# EAGLE board combined (EAGLE 6.5.0)
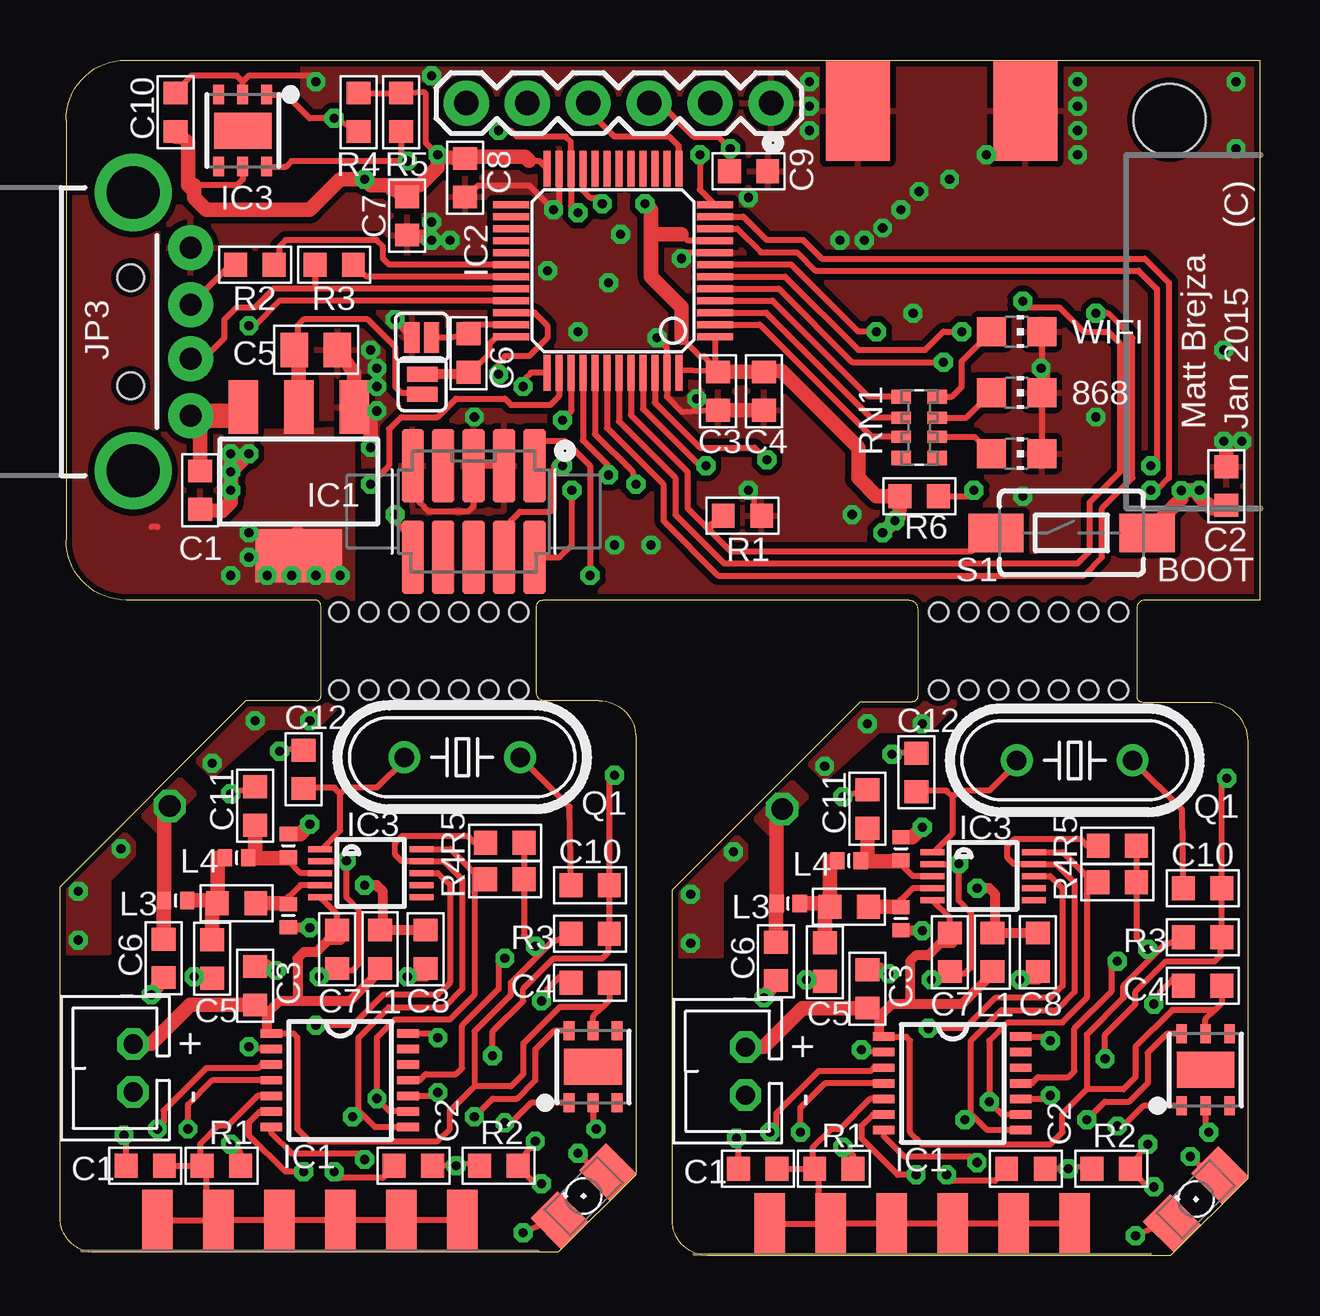
[diagram p0: board, top side]
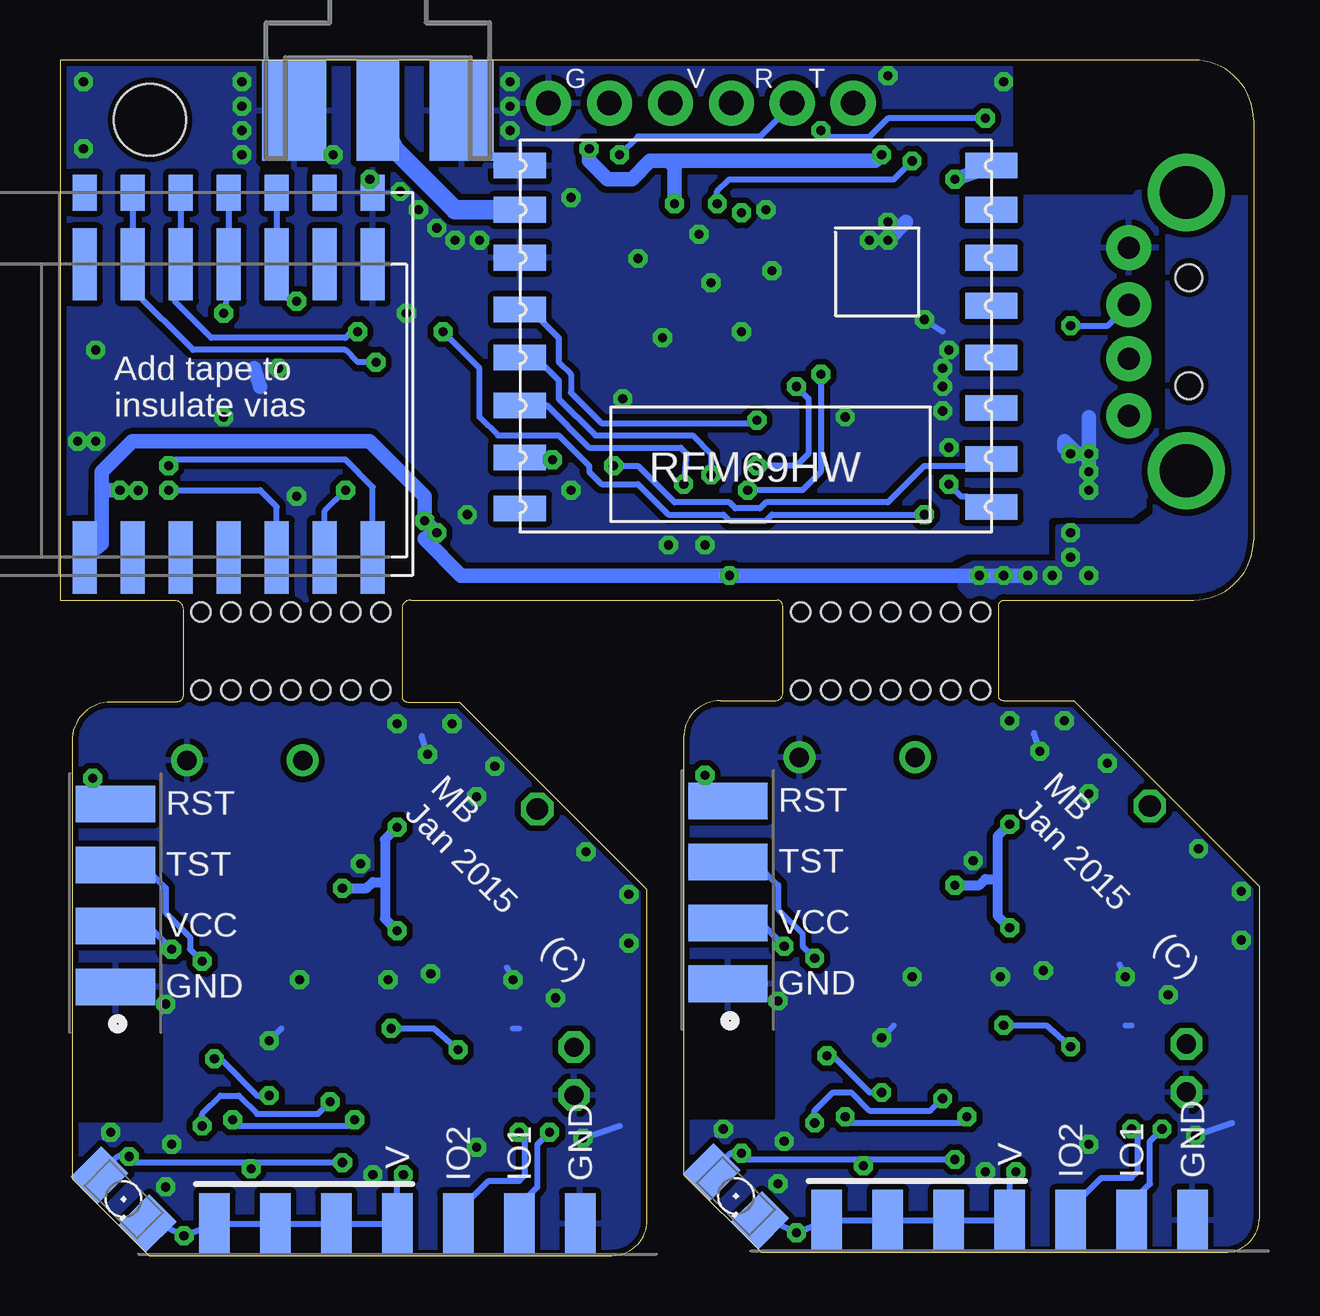
[diagram p1: board, bottom side, seen from below]

Size 50 x 49.81 mm. Coordinates in mm from the lower left corner, seen from the top.
Outline: 0.25,47.31 arc-90 2.75,49.81 50,49.81 50,27.31 45.25,27.31 arc90 44.88,26.94 44.88,23.31 arc90 45.12,23.06 47.88,23.06 arc-90 49.5,21.44 49.5,3.21 46.29,0 26.99,0 arc-90 25.53,1.46 25.53,15.24 33.35,23.06 35.5,23.06 arc90 35.75,23.31 35.75,26.94 arc90 35.38,27.31 20.12,27.31 arc90 19.87,27.06 19.87,23.43 arc90 20.19,23.11 22.48,23.11 arc-90 24,21.59 24,3.37 20.77,0.13 1.46,0.13 arc-90 0,1.59 0,15.37 7.75,23.11 10.68,23.11 arc90 10.88,23.31 10.88,27.06 arc90 10.62,27.31 2.75,27.31 arc-90 0.25,29.81 0.25,47.31
Copper layers (1*16): Top 0.035mm / dielectric 1.5mm / Bottom 0.035mm
Design rules "default *": minimum track width 8mil, minimum drill 13mil, track to track 8mil, track to pad 8mil, pad to pad 7mil, via to via 8mil, smd to smd 0mil, copper to edge 10mil, drill to drill 8mil, minimum pad ring 10mil, minimum via ring 8mil, stop-mask expansion 4mil, vias tented up to drill 16mil, thermal gap 10mil
Holes 3 mm at 46.24,47.33
Holes 0.8 mm at 16.62,26.81 17.88,26.81 19.12,26.81 16.62,23.56 17.88,23.56 19.12,23.56 40.38,26.81 41.62,26.81 42.88,26.81 44.12,26.81 40.38,23.56 41.62,23.56 42.88,23.56 44.12,23.56 15.38,26.81 14.12,26.81 12.88,26.81 11.62,26.81 15.38,23.56 14.12,23.56 12.88,23.56 11.62,23.56 39.12,23.56 37.88,23.56 36.62,23.56 39.12,26.81 37.88,26.81 36.62,26.81

## Footprints (pad centres in the part's own frame; a part is rotated, then mirrored left to right if it is on the bottom)
C0603-N = smd 0.95 x 1: 1 -0.8,0; 2 0.8,0
C0805-N = smd 1.15 x 1.45: 1 -0.9,0; 2 0.9,0
TSSOP14 = smd 0.9 x 0.35: 1 -2.875,1.95; 2 -2.875,1.3; 3 -2.875,0.65; 4 -2.875,0; 5 -2.875,-0.65; 6 -2.875,-1.3; 7 -2.875,-1.95; 8 2.825,-1.95; 9 2.825,-1.3; 10 2.825,-0.65; 11 2.825,0; 12 2.825,0.65; 13 2.825,1.3; 14 2.825,1.95
DFN6-L = smd 0.45 x 0.8: 1 -1,-1.5; 2 0,-1.5; 3 1,-1.5; 4 1,1.5; 5 0,1.5; 6 -1,1.5 | smd 2.4 x 1.5: EP 0,0
MSOP10 = smd 0.25 x 1: 1 -1,-2.113; 2 -0.5,-2.113; 3 0,-2.113; 4 0.5,-2.113; 5 1,-2.113; 6 1,2.113; 7 0.5,2.113; 8 0,2.113; 9 -0.5,2.113; 10 -1,2.113
TQFP48 = smd 0.3 x 1.5: 1 -2.75,-4.25; 2 -2.25,-4.25; 3 -1.75,-4.25; 4 -1.25,-4.25; 5 -0.75,-4.25; 6 -0.25,-4.25; 7 0.25,-4.25; 8 0.75,-4.25; 9 1.25,-4.25; 10 1.75,-4.25; 11 2.25,-4.25; 12 2.75,-4.25; 25 2.75,4.25; 26 2.25,4.25; 27 1.75,4.25; 28 1.25,4.25; 29 0.75,4.25; 30 0.25,4.25; 31 -0.25,4.25; 32 -0.75,4.25; 33 -1.25,4.25; 34 -1.75,4.25; 35 -2.25,4.25; 36 -2.75,4.25 | smd 1.5 x 0.3: 13 4.25,-2.75; 14 4.25,-2.25; 15 4.25,-1.75; 16 4.25,-1.25; 17 4.25,-0.75; 18 4.25,-0.25; 19 4.25,0.25; 20 4.25,0.75; 21 4.25,1.25; 22 4.25,1.75; 23 4.25,2.25; 24 4.25,2.75; 37 -4.25,2.75; 38 -4.25,2.25; 39 -4.25,1.75; 40 -4.25,1.25; 41 -4.25,0.75; 42 -4.25,0.25; 43 -4.25,-0.25; 44 -4.25,-0.75; 45 -4.25,-1.25; 46 -4.25,-1.75; 47 -4.25,-2.25; 48 -4.25,-2.75
SOT223 = smd 1.219 x 2.235: 1 -2.311,-3.099; 2 0,-3.099; 3 2.311,-3.099 | smd 3.6 x 2.2: 4 0,3.099
JST-2-TH = drill 0.8 octagon: 1 1,0; 2 -1,0
SWD_SMD_SHROUD = smd 0.914 x 3.048: 1 -2.54,-1.905; 2 -2.54,1.905; 3 -1.27,-1.905; 4 -1.27,1.905; 5 0,-1.905; 6 0,1.905; 7 1.27,-1.905; 8 1.27,1.905; 9 2.54,-1.905; 10 2.54,1.905
SJ_2S = smd 0.635 x 1.27: 1 -0.412,0; 2 0.412,0
USB-A-H = drill 0.914 pad 1.88: D+ 2.4,1.127; D- 2.4,-1.127; GND 2.4,3.5; VBUS 2.4,-3.5 | drill 2.2: GND2 0,-5.8; GND3 0,5.8 | hole 1.1: -0.1,2.25; -0.1,-2.25
FTDI_BASIC = drill 1.016 pad 1.88: CTS 10.16,0; DTR 0,0; GND 12.7,0; RXI 2.54,0; TXO 5.08,0; VCC 7.62,0
L0603-N = smd 0.95 x 1: 1 -0.8,0; 2 0.8,0
L0402-N = smd 0.59 x 0.72: 1 -0.48,0; 2 0.48,0
1206 = smd 1.6 x 1.803: A -1.422,0; C 1.422,0
CHIP-LED0805 = smd 1.2 x 1.2: A 0,-1.05; C 0,1.05
HC49/S = drill 0.813: 1 -2.413,0; 2 2.413,0
R0603-N = smd 0.95 x 1: 1 -0.8,0; 2 0.8,0
EXB38V = smd 0.6 x 0.8: 1 -1.275,-0.75; 4 1.275,-0.75; 5 1.275,0.75; 8 -1.275,0.75 | smd 0.5 x 0.8: 2 -0.4,-0.75; 3 0.4,-0.75; 6 0.4,0.75; 7 -0.4,0.75
TACTILE-SWITCH-1101NE = smd 2.3 x 1.6: 1 -3.15,0; 2 3.15,0
EDGE_4 = smd 1.524 x 3.302: 1 -3.81,0; 2 -1.27,0; 3 1.27,0; 4 3.81,0
MA07-1-SMD = smd 1.27 x 2.54: 1 -7.62,0; 2 -5.08,0; 3 -2.54,0; 4 0,0; 5 2.54,0; 6 5.08,0; 7 7.62,0
MA06-1-SMD = smd 1.27 x 2.54: 1 -7.62,0; 2 -5.08,0; 3 -2.54,0; 4 0,0; 5 2.54,0; 6 5.08,0
RFM = smd 2.184 x 1.067: ANT 19.651,2.889; DIO0 0,13.27; DIO1 0,11.143; DIO2 0,9.047; DIO3 0,6.889; DIO4 0,4.889; DIO5 0,2.889; GNDA 19.651,4.889; GNDB 19.651,1.048; MISO 19.651,9.047; MOSI 19.651,11.047; NC 19.651,15.334; NSS 19.651,13.206; RESET 0,15.27; SCK 19.651,7.048; VCC 0,1.048
ESP-07 = smd 1 x 1.5: 1 -13.4,0; 2 -11.4,0; 3 -9.4,0; 4 -7.4,0; 5 -5.4,0; 6 -3.4,0; 7 -1.4,0; 8 -1.4,15.95; 9 -3.4,15.95; 10 -5.4,15.95; 11 -7.4,15.95; 12 -9.4,15.95; 13 -11.4,15.95; 14 -13.4,15.95
ESP-03 = smd 1 x 3: 1 -13.4,0; 2 -11.4,0; 3 -9.4,0; 4 -7.4,0; 5 -5.4,0; 6 -3.4,0; 7 -1.4,0; 8 -1.4,12.2; 9 -3.4,12.2; 10 -5.4,12.2; 11 -7.4,12.2; 12 -9.4,12.2; 13 -11.4,12.2; 14 -13.4,12.2
J502-ND-142-0711-821/826 = smd 4.191 x 1.778: 1 2.115,0 | smd 4.191 x 2.667: G@1 2.115,3.495; G@2 2.115,-3.495 | smd 4.191 x 2.667 bottom: G@3 2.115,3.495; G@4 2.115,-3.495

## Placement (x,y rotation side)
C1  100n  [C0603-N]  3.56,3.75 0 top
C2  100n  [C0603-N]  14.73,3.75 0 top
C3  100n  [C0603-N]  8.13,11.24 90 top
C4  [C0603-N]  22.1,11.37 180 top
C5  5.1p  [C0603-N]  6.35,12.36 90 top
C6  5.1p  [C0603-N]  4.32,12.38 270 top
C7  1u  [C0603-N]  11.56,12.76 270 top
C8  2.4p  [C0603-N]  15.24,12.76 90 top
C9  1.2p  [C0603-N]  7.37,14.67 0 top
C10  47n  [C0603-N]  22.1,15.43 0 top
C11  2.4p  [C0603-N]  8.13,18.73 270 top
C12  14p  [C0603-N]  10.16,20.26 270 top
C13  100n  [C0603-N]  33.66,11.11 90 top
C14  1u  [C0603-N]  37.08,12.64 270 top
C15  14p  [C0603-N]  35.69,20.13 270 top
C16  2.4p  [C0603-N]  40.77,12.64 90 top
C17  2.4p  [C0603-N]  33.66,18.61 270 top
C18  1.2p  [C0603-N]  32.89,14.54 0 top
C19  5.1p  [C0603-N]  31.88,12.23 90 top
C20  5.1p  [C0603-N]  29.84,12.26 270 top
C21  47n  [C0603-N]  47.62,15.3 0 top
C22  100n  [C0603-N]  29.09,3.62 0 top
C23  100n  [C0603-N]  40.26,3.62 0 top
C24  [C0603-N]  47.62,11.24 180 top
C25  1u  [C0603-N]  27.43,36.02 270 top
C26  100n  [C0603-N]  17.03,37.6 90 top
C27  100n  [C0603-N]  16.89,44.91 270 top
C28  100n  [C0603-N]  28.7,45.18 0 top
C29  100n  [C0603-N]  29.34,36.02 270 top
C30  4u7  [C0603-N]  5.84,31.89 270 top
C31  4u7  [C0805-N]  10.67,37.73 0 top
C32  1u  [C0603-N]  48.62,32.06 90 top
C33  1u  [C0603-N]  14.48,43.32 270 top
C34  1u  [C0603-N]  4.83,47.64 90 top
IC1  MSP430G2X21  [TSSOP14]  11.68,7.3 0 top
IC2  HTU21D  [DFN6-L]  22.22,7.86 0 top
IC3  SI4012  [MSOP10]  12.95,15.94 270 top
IC4  MSP430G2X21  [TSSOP14]  37.21,7.18 0 top
IC5  SI4012  [MSOP10]  38.48,15.81 270 top
IC6  HTU21D  [DFN6-L]  47.75,7.74 0 top
IC7  STM32F072  [TQFP48]  23.05,41.03 90 top
IC8  1117EMP  [SOT223]  9.96,32.25 180 top
IC9  HTU21D  [DFN6-L]  7.62,46.88 180 top
J1  [JST-2-TH]  3.05,7.81 90 top
J2  [JST-2-TH]  28.57,7.68 90 top
J3  SWD_SHROUD_SMD  [SWD_SMD_SHROUD]  17.24,31 180 top
JP1  [SJ_2S]  15.1,36.3 270 top
JP2  [SJ_2S]  15.08,38.26 0 top
JP3  USB-A-H  [USB-A-H]  3.05,38.49 0 top
JP4  FTDI_BASICPTH  [FTDI_BASIC]  16.94,48.02 0 top
L1  120n  [L0603-N]  13.34,12.76 270 top
L2  3.6n  [L0402-N]  9.53,14.16 270 top
L3  6.8n  [L0402-N]  4.83,14.8 180 top
L4  30n  [L0402-N]  7.37,16.57 180 top
L5  3.6n  [L0402-N]  9.53,17.08 90 top
L6  30n  [L0402-N]  32.89,16.45 180 top
L7  6.8n  [L0402-N]  30.35,14.67 180 top
L8  3.6n  [L0402-N]  35.05,14.03 270 top
L9  3.6n  [L0402-N]  35.05,16.95 90 top
L10  120n  [L0603-N]  38.86,12.64 270 top
LED1  [1206]  21.82,2.48 225 top
LED2  [1206]  21.82,2.48 315 bottom
LED3  [1206]  47.35,2.35 225 top
LED4  [1206]  47.35,2.35 315 bottom
LED5  [CHIP-LED0805]  39.88,38.49 270 top
LED6  [CHIP-LED0805]  39.88,35.95 270 top
LED7  [CHIP-LED0805]  39.88,33.41 270 top
Q1  [HC49/S]  16.77,20.76 180 top
Q2  [HC49/S]  42.3,20.63 180 top
R1  47k  [R0603-N]  6.73,3.75 180 top
R2  1M  [R0603-N]  18.29,3.75 180 top
R3  22k  [R0603-N]  22.1,13.4 180 top
R4  4k7  [R0603-N]  18.54,15.68 0 top
R5  4k7  [R0603-N]  18.54,17.21 0 top
R6  1M  [R0603-N]  43.81,3.62 180 top
R7  47k  [R0603-N]  32.26,3.62 180 top
R8  22k  [R0603-N]  47.62,13.27 180 top
R9  4k7  [R0603-N]  44.07,15.55 0 top
R10  4k7  [R0603-N]  44.07,17.08 0 top
R11  10k  [R0603-N]  28.45,30.83 180 top
R12  100k  [R0603-N]  11.43,41.29 180 top
R13  10k  [R0603-N]  8.13,41.29 180 top
R14  4k7  [R0603-N]  14.22,47.64 90 top
R15  4k7  [R0603-N]  12.45,47.64 90 top
R16  1k  [R0603-N]  35.81,31.64 0 top
RN1  330  [EXB38V]  35.81,34.51 270 top
S1  SWITCH-MOMENTARY-2SMD-1101NE  [TACTILE-SWITCH-1101NE]  42.16,30.11 0 top
SV1  [EDGE_4]  47.69,15.01 90 bottom
SV2  [MA07-1-SMD]  10.41,1.46 0 bottom
SV3  [EDGE_4]  22.16,15.13 90 bottom
SV4  [MA07-1-SMD]  35.94,1.33 0 bottom
U$1  MA06-1  [MA06-1-SMD]  11.68,1.46 0 top
U$2  MA06-1  [MA06-1-SMD]  37.21,1.33 0 top
U$3  RFM69HW  [RFM]  11.18,46.46 180 bottom
U$4  ESP-07  [ESP-07]  35.56,28.33 0 bottom
X1  ESP-03  [ESP-03]  35.56,29.1 0 bottom
X2  SMA-142-0711-821/826  [J502-ND-142-0711-821/826]  36.75,49.82 270 bottom

## Library data of the parts
C1-C34 L1-L10 R1-R16 = passives-7351
IC1-IC6 IC9 SV1-SV4 U$1 U$2 U$4 X1 = Mine
IC7 IC8 J1-J3 = dtb
JP1 JP2 = SparkFun-Passives
JP3 JP4 = SparkFun-Connectors
LED1-LED7 = led
Q1 Q2 = crystal; OC_FARNELL: 1667008; OC_NEWARK: unknown
RN1 = resistor-dil; OC_FARNELL: unknown; OC_NEWARK: unknown
S1 = SparkFun-Electromechanical; PROD_ID: SWCH-00815
U$3 = hoperf
X2 = con-coax; MF: JOHNSON COMPONENTS; MPN: 142-0711-821; OC_FARNELL: 1019328; OC_NEWARK: 16F3627

## Nets
+3V1: C13.1 C14.1 C24.1 IC4.1 IC5.5 IC6.5 J2.1 L10.2 R8.2 R9.2 R10.2 SV1.2
+3V2: C25.1 C27.1 C28.1 C29.1 C31.1 C32.1 C33.1 C34.1 IC7.1 IC7.9 IC7.24 IC7.48 IC8.2 IC8.4 IC9.5 J3.1 JP1.2 JP4.VCC R14.2 R15.2 R16.1 S1.2 U$3.VCC U$4.1 X1.1
+3V3: C3.1 C4.1 C7.1 IC1.1 IC2.5 IC3.5 J1.1 L1.2 R3.2 R4.2 R5.2 SV3.2
CH_PD: IC7.5 U$4.13 X1.13
DIO0: IC7.45 U$3.DIO0
DM: IC7.32 JP3.D- R12.2
DP: IC7.33 JP3.D+ R13.2
GND: C1.1 C2.1 C3.2 C4.2 C5.1 C6.2 C7.2 C8.1 C10.1 C11.1 C12.1 IC1.14 IC2.2 IC3.2 J1.2 Q1.1 R1.1 R2.1 SV2.7 SV3.1
GND1: C13.2 C14.2 C15.1 C16.1 C17.1 C19.1 C20.2 C21.1 C22.1 C23.1 C24.2 IC4.14 IC5.2 IC6.2 J2.2 Q2.1 R6.1 R7.1 SV1.1 SV4.7
GND2: C25.2 C27.2 C28.2 C29.2 C30.2 C31.2 C32.2 C33.2 C34.2 IC7.8 IC7.23 IC7.47 IC8.1 IC9.2 J3.3 J3.5 J3.9 JP2.1 JP3.GND JP4.GND LED5.C LED6.C LED7.C R11.1 U$3.GNDA U$3.GNDB U$4.8 X1.8 X2.G@1 X2.G@2 X2.G@3 X2.G@4
GPIO0: IC7.10 U$4.7 X1.7
GPIO15: IC7.11 U$4.5 X1.5
I2C2_SCL: IC7.21 IC9.6 R14.1
I2C2_SDA: IC7.22 IC9.1 R15.1
IO1: IC1.3 SV2.6
IO2: IC1.4 SV2.5
IO3: IC4.3 SV4.6
IO4: IC4.4 SV4.5
MISO: IC7.40 U$3.MISO
MOSI: IC7.41 U$3.MOSI
N$1: IC1.2 IC3.8
N$2: IC1.11 SV3.3
N$4: C8.2 L1.1 L2.2 L5.2
N$5: C12.2 IC3.1 Q1.2
N$6: IC4.11 SV1.3
N$7: C5.2 C9.1 L3.1 L4.2
N$8: C11.2 IC3.3 L4.1 L5.1
N$9: C9.2 IC3.4 L2.1
N$10: C6.1 L3.2
N$11: C15.2 IC5.1 Q2.2
N$12: C1.2 IC1.5 R1.2 U$1.1 U$1.2 U$1.3 U$1.4 U$1.5 U$1.6
N$13: C2.2 IC1.7 LED1.A LED2.A R2.2
N$14: C16.2 L8.2 L9.2 L10.1
N$15: C10.2 IC1.10 R3.1 SV3.4
N$16: C18.1 C19.2 L6.2 L7.1
N$17: C17.2 IC5.3 L6.1 L9.1
N$18: C18.2 IC5.4 L8.1
N$19: C20.1 L7.2
N$20: C22.2 IC4.5 R7.2 U$2.1 U$2.2 U$2.3 U$2.4 U$2.5 U$2.6
N$21: C23.2 IC4.7 LED3.A LED4.A R6.2
N$22: C21.2 IC4.10 R8.1 SV1.4
N$23: IC4.2 IC5.8
N$25: C26.1 IC7.36 JP1.1
N$26: C26.2 IC7.35 JP2.2
N$27: IC7.44 R11.2 S1.1
N$28: IC7.31 R12.1
N$29: IC7.30 R13.1
N$30: LED5.A RN1.8
N$31: LED6.A RN1.7
N$32: LED7.A RN1.6
N$33: IC7.2 RN1.3
N$34: IC7.3 RN1.2
N$35: IC7.4 RN1.1
N$36: IC7.14
N$37: IC7.15
N$38: IC7.16
N$39: IC7.17
N$40: IC7.26
N$41: IC7.27
N$42: U$3.ANT X2.1
N$44: R16.2 U$4.6 X1.6
N$45: U$4.2 X1.2
N$46: U$4.4 X1.4
N$47: U$4.3 X1.3
NRST: IC7.7 J3.10
NSS: IC7.46 U$3.NSS
RST: IC7.38 U$3.RESET
SCK: IC7.39 U$3.SCK
SCL: IC1.8 IC2.6 IC3.9 R5.1
SCL1: IC4.8 IC5.9 IC6.6 R10.1
SDA: IC1.9 IC2.1 IC3.10 R4.1
SDA1: IC4.9 IC5.10 IC6.1 R9.1
SWCLK: IC7.37 J3.4
SWDAT: IC7.34 J3.2
USART1_RX: IC7.43 U$4.10 X1.10
USART1_TX: IC7.42 U$4.11 X1.11
USART2_RX: IC7.13 JP4.TXO
USART2_TX: IC7.12 JP4.RXI
VBUS: C30.1 IC8.3 JP3.VBUS
VCCS: IC1.6 LED1.C LED2.C SV2.1 SV2.2 SV2.3 SV2.4
VCCS1: IC4.6 LED3.C LED4.C SV4.1 SV4.2 SV4.3 SV4.4
VCCS2: IC1.13
VCCS3: IC4.13
W_RST: IC7.6 U$4.12 X1.12

## Tracks (layer width: path | path; a pad name or v marks a point on that pad's centre or on a via)
+3V1  (via drill 0.38)
  Top 0.229: 46.35,10.22 44.83,8.7
  Top 0.254: C13.1 33.91,10.22 34.16,9.97 | 34.16,9.21 IC4.1 35.26,9.13 35.43,8.95 35.43,5.14 35.94,4.64 41.27,4.64 41.78,5.14 41.78,5.91 42.8,6.92 | 37.21,13.02 C14.1 37.08,14.1 IC5.5 | 45.59,12.51 44.32,11.24 44.32,10.73 42.8,9.21 42.8,6.92 | 45.59,12.51 46.1,13.02 46.27,13.02 R8.2 | 45.59,12.51 v45.34,12.76 44.87,13.23 R9.2 R10.2 | IC6.5 47.75,9.84 48.13,10.22 | C24.1 48.42,10.52 48.13,10.22 | 48.13,10.22 46.35,10.22 | 44.83,8.7 44.83,7.43 44.32,6.92 42.8,6.92
  Top 0.406: 35.43,10.48 37.59,10.48 39.15,12.04 L10.2 | 35.43,10.48 34.67,10.48 34.16,9.97 34.16,9.21 | 37.21,13.02 36.7,13.02 36.2,12.51 35.69,12.51 35.43,12.26 35.43,10.48
  Top 0.61: C13.1 30.95,10.31 29.34,8.7 28.59,8.7 J2.1
  Bottom 0.254: SV1.2 47.39,14.03 46.61,14.03 v45.34,12.76
+3V2  (via drill 0.38)
  Top 0.254: C25.1 25.91,36.89 IC7.48 | C25.1 26.85,37.48 26.67,37.48 25.91,38.24 | IC7.1 27.3,37.02 C25.1 | 4.06,30.37 3.81,30.37 | IC9.5 7.62,44.84 7.37,44.59 5.59,44.59 | C34.1 4.83,46.62 | R15.2 R14.2 15.15,48.49 15.24,48.4 15.24,46.37 v15.75,45.86 | C31.1 9.91,37.59 9.91,38.75 10.16,39 12.83,39 13.97,37.86 13.97,36.21 14.22,35.95 14.53,35.95 JP1.2 | JP4.VCC 25.02,48.02 26.42,46.62 27.43,46.62 v27.94,46.11 27.94,45.61 27.83,45.49 C28.1 | 19.56,45.61 19.98,45.61 IC7.24 | S1.2 45.31,30.47 | IC7.9 26.18,42.28 25.91,42.56 | 19.78,33.13 J3.1 19.81,32.94 19.81,33.67 20.07,33.92 21.08,33.92 22.1,32.91 v22.1,28.33
  Top 0.61: 9.91,30.11 10.16,29.86 | 13.97,44.59 14.99,44.59 15.75,45.35 v15.75,45.86 15.82,45.78 C27.1 16.92,45.78 19.38,45.78 19.56,45.61 | 13.97,44.59 12.95,44.59 v12.7,44.84 11.68,44.84 10.41,43.57 6.1,43.57 5.59,44.08 5.59,44.34 | C33.1 13.83,44.45 13.97,44.59 | IC8.2 9.96,37.31 C31.1 | 4.83,46.62 5.08,46.62 5.33,46.37 5.33,44.59 5.59,44.34 | 5.59,44.59 5.59,44.34 | 24.64,42.56 24.64,40.78 25.91,39.51 25.91,38.24 | 24.64,42.56 24.64,43.57 v24.38,43.83 | 25.91,42.56 24.64,42.56 | C25.1 C29.1 30.07,36.87 33.27,33.67 33.27,32.4 34.04,31.64 R16.1 34.96,30.79 v34.8,30.62 v34.29,30.11 | C32.1 48.54,31.13 48.01,31.13 47.5,31.64 v47.5,31.89 46.75,31.89 v46.74,31.88 46.74,31.54 S1.2
  Bottom 0.254: 27.43,45.35 27.18,44.84 | U$4.1 X1.1
  Bottom 0.61: v9.65,28.33 v22.1,28.33 33.27,28.33 34.8,29.86 v34.29,30.11 v34.8,30.62 34.8,31.64 37.08,33.92 46.99,33.92 48.26,32.65 48.26,31.89 | v27.94,46.11 27.94,45.61 27.18,44.84 26.16,44.84 25.4,45.61 24.64,45.61 | 24.64,45.61 16,45.61 v15.75,45.86 | U$3.VCC 11.11,45.42 v12.7,44.84 | X1.1 48.26,29.67 48.26,31.89 | 48.26,31.89 v47.5,31.89 | v24.38,43.83 24.38,45.35 24.64,45.61
  other vias: 7.87,30.11 7.87,29.1 8.64,28.33 10.67,28.33 11.68,28.33 7.11,28.33
  pour Top (isolate 0.254): -0.51,44.08 4.06,44.08 3.81,27.57 -0.25,28.08 -0.25,35.7 -0.51,35.7
  pour Bottom (isolate 0.254): 12.45,24.78 4.32,30.87 4.32,33.41 3.81,34.43 3.81,43.07 4.57,43.83 4.06,44.34 2.54,44.59 2.54,44.84 2.03,44.08 -0.25,44.08 -0.25,26.56 0,26.3
  pour Top (isolate 0.254, no thermals): 3.3,27.32 12.19,27.32 12.19,33.67 12.7,34.43 2.79,34.18 2.03,33.16 2.03,27.83 2.29,27.57
  pour Bottom (isolate 0.254): 3.81,27.32 11.94,27.32 12.45,27.83 12.45,28.59 11.94,28.84 8.38,28.84 8.38,30.37 4.32,30.37 4.06,30.62 4.06,28.84 3.81,28.59
+3V3  (via drill 0.38)
  Top 0.229: 20.83,10.35 19.3,8.83
  Top 0.254: C3.1 8.38,10.35 8.64,10.1 | 8.64,9.33 IC1.1 9.73,9.25 9.91,9.08 9.91,5.27 10.41,4.76 15.75,4.76 16.26,5.27 16.26,6.03 17.27,7.05 | 11.68,13.14 C7.1 11.56,14.22 IC3.5 | 20.07,12.64 18.8,11.37 18.8,10.86 17.27,9.33 17.27,7.05 | 20.07,12.64 20.57,13.14 20.74,13.14 R3.2 | 20.07,12.64 v19.81,12.89 19.34,13.36 R4.2 R5.2 | IC2.5 22.22,9.96 22.61,10.35 | C4.1 22.9,10.64 22.61,10.35 | 22.61,10.35 20.83,10.35 | 19.3,8.83 19.3,7.56 18.8,7.05 17.27,7.05
  Top 0.406: 9.91,10.6 12.06,10.6 13.62,12.16 L1.2 | 9.91,10.6 9.14,10.6 8.64,10.1 8.64,9.33 | 11.68,13.14 11.18,13.14 10.67,12.64 10.16,12.64 9.91,12.38 9.91,10.6
  Top 0.61: C3.1 5.42,10.44 3.81,8.83 3.06,8.83 J1.1
  Bottom 0.254: SV3.2 21.86,14.16 21.08,14.16 v19.81,12.89
CH_PD  (via drill 0.38)
  Top 0.254: v36.83,37.22 33.02,37.22 29.96,40.28 IC7.5
  Bottom 0.254: v36.83,37.22 37.59,37.22 38.1,37.73 44.45,37.73 46.99,40.27 46.99,41.27 X1.13 U$4.13
DIO0  (via drill 0.38)
  Top 0.254: IC7.45 24.3,35.28 26.67,32.91 v26.92,32.91
  Bottom 0.254: v26.92,32.91 25.91,32.91 24.38,31.38 22.1,31.38 21.84,31.13 20.83,31.13 20.57,31.38 15.49,31.38 13.97,32.91 11.46,32.91 U$3.DIO0
DM
  Top 0.254: IC7.32 10.67,40.28 | 10.67,40.28 8.9,40.28 8.13,39.51 7.37,39.51 6.86,39 6.86,38.24 5.99,37.37 JP3.D- | R12.2 10.63,40.32 10.67,40.28
DP  (via drill 0.38)
  Top 0.254: IC7.33 9.16,39.78 8.13,38.75 v7.87,38.75 | R13.2 7.13,41.3 JP3.D+
  Bottom 0.254: v7.87,38.75 6.32,38.75 JP3.D+
GND  (via drill 0.38)
  Top 0.254: IC3.2 v11.93,16.44 v11.94,16.45 11.94,14.92 12.45,14.41 12.45,12.13 12.19,11.87 11.68,11.87 | IC1.14 15.41,9.25 v15.75,9.08 | C11.1 v7.11,19.24 | C5.1 v5.59,11.62 | C3.2 8.68,12.22 v9.02,11.87 | C7.2 11.09,11.79 v10.79,11.62 | C12.1 9.75,21.11 v9.15,21.02 | IC2.2 22.22,5.4 v22.35,5.27 | C2.1 13.86,3.64 13.46,3.24 11.68,3.24 v11.43,3.49 | C4.2 20.83,11.62 20.32,11.11 20.32,10.86 v20.07,10.6 | C10.1 21.25,18.69 Q1.1 | v19.81,4.76 19.65,4.6 R2.1 19.09,3.71 19.81,2.98 v20.07,2.98 | C1.1 2.76,4.93 v2.67,5.02 | R1.1 7.53,4.29 v7.11,4.64
  Top 0.406: C8.1 15.24,11.62 v14.48,11.62
  Top 0.61: v3.81,10.86 C6.2
  Bottom 0.254: v11.94,16.45 12.19,16.45 | 5.59,9.59 5.33,9.59 | v15.75,9.08 15.24,9.59 | v5.59,11.62 5.84,12.13 | v10.79,11.62 10.67,11.62 | v9.15,21.02 9.4,21.78 | v22.35,5.27 22.61,5.02 | v11.43,3.49 11.18,3.49 | v19.81,4.76 19.81,5.02 | v2.67,5.02 1.14,5.52
  other vias: 0.76,13.14 2.54,16.95 0.76,15.18 8.13,22.29 6.35,20.51 10.41,22.29
  pour Bottom (isolate 0.254): 0,23.05 24.13,23.05 24.13,-0.06 0,-0.06
  pour Top: 0,12.64 2.03,12.64 2.03,15.68 3.05,16.7 3.05,17.21 2.29,17.97 2.03,17.97 -0.25,15.68 -0.25,12.89
  pour Top: 6.35,20 8.64,22.03 10.67,22.03 11.94,23.3 7.37,23.3 5.33,21.27 5.33,21.02
GND1  (via drill 0.38)
  Top 0.254: IC5.2 37.46,16.31 v37.47,16.32 37.47,14.8 37.97,14.29 37.97,12 37.72,11.75 37.21,11.75 | IC4.14 40.94,9.13 v41.27,8.95 | C17.1 v32.64,19.11 | C19.1 v31.11,11.49 | C13.2 34.2,12.09 v34.54,11.75 | C14.2 36.62,11.66 v36.32,11.49 | C15.1 35.27,20.98 v34.68,20.89 | IC6.2 47.75,5.28 v47.88,5.14 | C23.1 39.39,3.51 38.99,3.11 37.21,3.11 v36.96,3.37 | C24.2 46.35,11.49 45.85,10.99 45.85,10.73 v45.59,10.48 | C21.1 46.77,18.57 Q2.1 | v45.34,4.64 45.17,4.47 R6.1 44.62,3.58 45.34,2.86 v45.59,2.86 | C22.1 28.29,4.8 v28.19,4.89 | R7.1 33.06,4.17 v32.64,4.51
  Top 0.406: C16.1 40.77,11.49 v40.01,11.49
  Top 0.61: v29.34,10.73 C20.2
  Bottom 0.254: v37.47,16.32 37.72,16.32 | 31.11,9.46 30.86,9.46 | v41.27,8.95 40.77,9.46 | v31.11,11.49 31.37,12 | v36.32,11.49 36.2,11.49 | v34.68,20.89 34.92,21.65 | v47.88,5.14 48.13,4.89 | v36.96,3.37 36.7,3.37 | v45.34,4.64 45.34,4.89 | v28.19,4.89 26.67,5.4
  other vias: 26.29,13.02 28.07,16.83 26.29,15.05 33.66,22.16 31.88,20.38 35.94,22.16
  pour Bottom (isolate 0.254): 25.53,22.92 49.66,22.92 49.66,-0.19 25.53,-0.19
  pour Top: 25.53,12.51 27.56,12.51 27.56,15.56 28.57,16.57 28.57,17.08 27.81,17.84 27.56,17.84 25.27,15.56 25.27,12.76
  pour Top: 31.88,19.88 34.16,21.91 36.2,21.91 37.47,23.18 32.89,23.18 30.86,21.15 30.86,20.89
GND2  (via drill 0.38)
  Top 0.254: C25.2 25.96,35.14 25.3,35.8 IC7.47 25.3,37.83 v24.89,38.24 | J3.3 J3.5 17.24,31.22 17.02,31 15.37,31 14.99,31.38 14.99,33.38 J3.9 14.48,33.64 14.48,34.18 | JP2.1 14.46,38.38 v13.97,39 | IC7.23 20.8,43.8 v20.57,43.57 19.56,44.59 17.45,44.59 C27.2 | IC9.2 7.62,48.91 | 7.62,48.91 7.37,49.16 5.47,49.16 C34.2 | v10.67,48.91 10.41,49.16 7.87,49.16 7.62,48.91 | R11.1 28.96,31.17 28.96,31.64 v28.7,31.89 | C28.2 29.58,44.96 | IC7.8 26.15,41.78 v25.91,41.54 | v13.21,35.19 12.43,35.19 IC8.1 | LED5.C LED6.C | LED6.C LED7.C | LED6.C 41.15,35.95 41.15,36.72 v40.89,36.97
  Top 0.305: J3.9 14.7,33.13
  Top 0.61: C33.2 15.13,42.44 v15.49,42.3 | IC8.1 12.27,36.75 C31.2 | C30.2 6.75,31.01 7.11,31.38 v7.11,32.65 | v7.11,32.65 v7.11,33.41 | v7.11,32.65 v7.87,33.41 | C32.2 48.62,33.56 v48.51,33.92 | C29.2 C25.2 | v12.95,33.67 12.95,34.94 v13.21,35.19
  Bottom 0.254: v13.97,39 13.21,38.49 | v28.7,44.08 28.45,44.08 | v24.89,38.24 24.64,38.24
  Bottom 0.61: 41.91,36.97 41.66,36.21 | v15.49,42.3 14.73,43.07 | v7.11,33.41 7.11,34.94 | v7.11,33.41 v7.11,32.65 | v7.11,33.41 7.62,33.41 8.13,33.92 8.13,33.67 v7.87,33.41
  other vias: 32.51,42.3 35.05,43.57 33.53,42.3 35.81,44.34 37.08,44.84 38.61,45.86 42.42,45.86 42.42,46.88 42.42,47.89 42.42,48.91 31.24,46.88 34.29,42.81 49.26,33.92 15.49,43.07 31.24,47.89 31.24,48.91 26.54,35.7 35.56,39.26 43.18,34.94 40.13,31.64 33.02,30.87 24.64,29.6 23.11,29.6 49.02,48.91 49.02,46.11 48.51,37.73 21.59,38.49 20.32,41.03 23.37,42.56 16.26,42.3 15.49,49.16 22.86,40.53 17.27,34.94 12.95,37.73 13.21,36.97 13.21,36.21 7.11,31.89
  pour Bottom (isolate 0.254, rank 2): -0.51,50.18 52.07,50.18 52.07,27.32 -1.52,27.32 -1.52,29.1
  pour Top (isolate 0.254, rank 2): 50.29,49.92 50.29,44.08 50.55,26.05 13.72,27.06 -1.52,26.56 -1.78,43.83 10.16,43.57 10.16,50.69 11.94,50.94
GPIO0  (via drill 0.38)
  Top 0.254: IC7.10 28.22,42.78 29.21,41.8 30.73,41.8 31.5,41.03 44.96,41.03 45.72,40.27 45.72,33.16 v45.47,32.91
  Bottom 0.254: 45.21,32.91 v45.47,32.91 45.21,33.16 38.1,33.16 36.96,32.02 X1.7 U$4.7
GPIO15  (via drill 0.38)
  Top 0.254: IC7.11 28.48,43.28 29.46,42.3 30.99,42.3 31.75,41.54 45.21,41.54 46.23,40.53 46.23,32.4 45.72,31.89 v45.47,31.89
  Bottom 0.254: v45.47,31.89 41.66,31.89 40.96,31.19 X1.5 U$4.5
I2C2_SCL  (via drill 0.38)
  Top 0.254: IC7.21 21.8,44.38 22.1,44.08 22.35,44.08 v22.61,43.83 | IC9.6 9.42,45.38 9.65,45.61 v14.48,45.61 14.22,45.86 R14.1
  Bottom 0.254: v22.61,43.83 22.61,44.34 22.1,44.84 15.24,44.84 v14.48,45.61
I2C2_SDA  (via drill 0.38)
  Top 0.254: v21.59,43.45 21.3,43.74 IC7.22 21.3,46.4 21.08,46.62 19.05,46.62 18.8,46.88 v18.29,46.88 | R15.1 v11.43,47.38 10.41,47.38 9.42,48.38 IC9.1
  Bottom 0.254: v21.59,43.45 21.59,43.32 | v18.29,46.88 18.03,46.62 16.26,46.62 15.49,47.38 v11.43,47.38
IO1  (via drill 0.38)
  Top 0.254: IC1.3 8.4,7.95 8.26,7.81 6.1,7.81 4.32,6.03 4.32,5.52 v4.06,5.27
  Bottom 0.254: SV2.6 5.33,2.22 4.57,2.98 4.57,4.76 v4.06,5.27
IO2  (via drill 0.38)
  Top 0.254: IC1.4 6.35,7.3 5.33,6.29 v5.33,5.27
  Bottom 0.254: SV2.5 7.87,1.97 6.6,3.24 5.33,3.24 5.08,3.49 5.08,5.02 v5.33,5.27
IO3  (via drill 0.38)
  Top 0.254: IC4.3 33.92,7.83 33.78,7.68 31.62,7.68 29.84,5.91 29.84,5.4 v29.59,5.14
  Bottom 0.254: SV4.6 30.86,2.1 30.1,2.86 30.1,4.64 v29.59,5.14
IO4  (via drill 0.38)
  Top 0.254: IC4.4 31.88,7.18 30.86,6.16 v30.86,5.14
  Bottom 0.254: SV4.5 33.4,1.84 32.13,3.11 30.86,3.11 30.61,3.37 30.61,4.89 v30.86,5.14
MISO  (via drill 0.38)
  Top 0.254: IC7.40 21.8,33.97 22.86,32.91 v22.86,32.52
  Bottom 0.254: U$3.MISO 30.16,37.42 29.21,36.46 29.21,35.7 27.69,34.18 23.62,34.18 22.86,33.41 v22.86,32.52
MOSI  (via drill 0.38)
  Top 0.254: v24,32.14 23.88,32.65 22.3,34.23 IC7.41
  Bottom 0.254: U$3.MOSI 29.69,35.42 27.94,33.67 24.13,33.67 23.88,33.41 v24,32.14
N$1  (via drill 0.38)
  Top 0.254: IC3.8 15.75,15.94 16.26,15.43 16.26,11.37 15.75,10.86 13.46,10.86 12.19,9.59 v10.67,9.59 | v7.87,8.7 8.78,8.57 IC1.2
  Bottom 0.254: v10.67,9.59 8.89,9.59 v7.87,8.7
N$2  (via drill 0.38)
  Top 0.254: v18.54,12.38 18.29,12.13 18.29,11.11 16.76,9.59 16.76,7.81 16.51,7.56 15.24,7.56 14.99,7.3 IC1.11
  Bottom 0.254: v18.54,12.38 19.05,12.89 19.05,13.4 20.07,14.41 20.07,15.43 21.04,16.4 SV3.3
N$3
  cutout Bottom: 23.88,10.1 20.32,10.1 20.32,5.78 24.13,5.78 24.13,6.29
N$4  (via drill 0.38)
  Top 0.254: L2.2 9.77,13.68 9.79,13.65
  Top 0.406: 10.3,17.86 v10.41,17.97 | v10.41,13.65 9.79,13.65 | 13.46,13.69 13.46,13.56 C8.2 | 13.46,13.69 13.46,15.18 13.21,15.43 v12.7,15.43 | 13.46,13.69 L1.1
  Top 0.61: L5.2 10.01,17.56 v10.41,17.97
  Bottom 0.406: v10.41,17.97 10.92,17.46 10.92,15.68 | 10.92,15.68 10.92,14.16 v10.41,13.65 | v12.7,15.43 11.68,15.43 11.43,15.68 10.92,15.68
N$5
  Top 0.254: IC3.1 10.91,16.94 11.68,17.72 11.68,19.24 | 11.68,19.24 11.43,19.49 10.25,19.49 C12.2 | Q1.2 14.36,20.64 13.21,19.49 11.94,19.49 11.68,19.24
N$6  (via drill 0.38)
  Top 0.254: v44.07,12.26 43.81,12 43.81,10.99 42.29,9.46 42.29,7.68 42.04,7.43 40.77,7.43 40.51,7.18 IC4.11
  Bottom 0.254: v44.07,12.26 44.58,12.76 44.58,13.27 45.59,14.29 45.59,15.3 46.56,16.28 SV1.3
N$7
  Top 0.61: 6.6,14.58 C9.1 | C5.2 6.35,14.5 C9.1 | L3.1 6.57,14.8 C9.1 | C9.1 6.57,16.57 L4.2
N$8
  Top 0.254: IC3.3 10.02,15.94 9.53,16.43
  Top 0.305: 9.53,16.43 L5.1
  Top 0.61: C11.2 8.13,16.56 | 8.13,16.56 9.48,16.56 L5.1 | 8.13,16.56 7.86,16.56 L4.1
N$9
  Top 0.254: IC3.4 10.03,15.44 9.53,14.94 | L2.1 9.54,14.67
  Top 0.305: 9.53,14.94 L2.1
  Top 0.61: C9.2 9.54,14.67
N$10  (via drill 0.9)
  Top 0.61: C6.1 4.32,14.77 L3.2 4.35,18.51 v4.57,18.73
  pour Top: 3.05,18.99 3.05,18.73 4.06,17.72 5.59,19.24 4.57,20.26
N$11
  Top 0.254: IC5.1 36.43,16.81 37.21,17.59 37.21,19.11 | 37.21,19.11 36.96,19.37 35.78,19.37 C15.2 | Q2.2 39.88,20.51 38.73,19.37 37.47,19.37 37.21,19.11
N$12
  Top 0.254: 6.1,1.59 6.1,3.75 R1.2 | 6.1,1.59 6.1,1.46 U$1.1 | C1.2 R1.2 | IC1.5 8.24,6.65 6.99,5.4 6.6,5.4 5.84,4.64 5.84,3.66 R1.2 | U$1.6 U$1.5 U$1.4 U$1.3 U$1.2 6.22,1.46 6.1,1.59
N$13  (via drill 0.38)
  Top 0.254: IC1.7 8.81,5.1 9.65,4.25 12.45,4.25 v12.7,4 | LED2.A 22.36,3.48 v21.59,4.25 | C2.2 v16.51,3.75 16.84,3.82 R2.2
  Bottom 0.254: LED2.A 22.06,4.25 v21.59,4.25 21.34,4 16.51,4 | v12.7,4 16.51,4 | 16.51,4 v16.51,3.75
N$14  (via drill 0.38)
  Top 0.254: L8.2 35.29,13.55 35.32,13.53
  Top 0.406: 35.83,17.73 v35.94,17.84 | v35.94,13.53 35.32,13.53 | 38.99,13.56 38.99,13.44 C16.2 | 38.99,13.56 38.99,15.05 38.73,15.3 v38.23,15.3 | 38.99,13.56 L10.1
  Top 0.61: L9.2 35.53,17.43 v35.94,17.84
  Bottom 0.406: v35.94,17.84 36.45,17.34 36.45,15.56 | 36.45,15.56 36.45,14.03 v35.94,13.53 | v38.23,15.3 37.21,15.3 36.96,15.56 36.45,15.56
N$15  (via drill 0.38)
  Top 0.254: IC1.10 15.64,6.65 v15.75,6.79 | 22.95,19.84 v23.11,20.01 22.9,19.79 C10.2 R3.1 22.86,13.56 22.86,12.64 22.61,12.38 20.57,12.38 19.3,11.11 19.3,10.6 18.03,9.33 v18.03,8.32
  Bottom 0.254: SV3.4 22.2,18.99 22.86,18.99 23.11,19.49 v23.11,20.01 | v18.03,8.32 17.78,8.32 16.26,6.79 v15.75,6.79
N$16
  Top 0.61: 32.13,14.45 C18.1 | C19.2 31.88,14.38 C18.1 | L7.1 32.09,14.67 C18.1 | C18.1 32.09,16.45 L6.2
N$17
  Top 0.254: IC5.3 35.55,15.81 35.05,16.3
  Top 0.305: 35.05,16.3 L9.1
  Top 0.61: C17.2 33.66,16.43 | 33.66,16.43 35.01,16.43 L9.1 | 33.66,16.43 33.39,16.43 L6.1
N$18
  Top 0.254: IC5.4 35.55,15.31 35.05,14.81 | L8.1 35.05,14.53 35.07,14.54
  Top 0.305: 35.05,14.81 L8.1
  Top 0.61: C18.2 35.07,14.54
N$19  (via drill 0.9)
  Top 0.61: C20.1 29.84,14.64 L7.2 29.87,18.38 v30.1,18.61
  pour Top: 28.57,18.86 28.57,18.61 29.59,17.59 31.11,19.11 30.1,20.13
N$20
  Top 0.254: 31.62,1.46 31.62,3.62 R7.2 | 31.62,1.46 31.62,1.33 U$2.1 | C22.2 R7.2 | IC4.5 33.77,6.53 32.51,5.27 32.13,5.27 31.37,4.51 31.37,3.53 R7.2 | U$2.6 U$2.5 U$2.4 U$2.3 U$2.2 31.75,1.33 31.62,1.46
N$21  (via drill 0.38)
  Top 0.254: IC4.7 34.34,4.97 35.18,4.13 37.97,4.13 v38.23,3.87 | LED4.A 47.89,3.36 v47.12,4.13 | C23.2 v42.04,3.62 42.37,3.69 R6.2
  Bottom 0.254: LED4.A 47.58,4.13 v47.12,4.13 46.86,3.87 42.04,3.87 | v38.23,3.87 42.04,3.87 | 42.04,3.87 v42.04,3.62
N$22  (via drill 0.38)
  Top 0.254: IC4.10 41.16,6.53 v41.27,6.67 | 48.48,19.71 v48.64,19.88 48.42,19.66 C21.2 R8.1 48.39,13.44 48.39,12.51 48.13,12.26 46.1,12.26 44.83,10.99 44.83,10.48 43.56,9.21 v43.56,8.19
  Bottom 0.254: SV1.4 47.73,18.86 48.39,18.86 48.64,19.37 v48.64,19.88 | v43.56,8.19 43.31,8.19 41.78,6.67 v41.27,6.67
N$23  (via drill 0.38)
  Top 0.254: IC5.8 41.27,15.81 41.78,15.3 41.78,11.24 41.27,10.73 38.99,10.73 37.72,9.46 v36.2,9.46 | v33.4,8.57 34.31,8.45 IC4.2
  Bottom 0.254: v36.2,9.46 34.42,9.46 v33.4,8.57
N$24
  cutout Bottom: 49.4,9.97 45.85,9.97 45.85,5.65 49.66,5.65 49.66,6.16
N$25
  Top 0.254: IC7.36 18.2,38.28 17.91,37.99 17.91,37.6 17.02,36.72 16.54,36.72 C26.1 16.51,36.71
  Top 0.406: 16.51,36.71 JP1.1
N$26
  Top 0.254: IC7.35 16.83,38.78 C26.2 16.3,38.26 JP2.2
N$27
  Top 0.254: IC7.44 23.8,35.01 26.16,32.65 26.16,31.13 26.92,30.37 | 26.92,30.37 27.94,29.35 38,29.35 S1.1 | 26.92,30.37 27.14,30.37 27.43,30.66 | 26.92,30.37 27.43,30.66 | 27.43,30.66 R11.2
N$28
  Top 0.254: IC7.31 12.78,40.78 R12.1
N$29
  Top 0.254: IC7.30 13.72,41.28 13.46,41.54 13.46,42.05 13.21,42.3 9.4,42.3 9.14,42.05 9.14,41.45 R13.1
N$30
  Top 0.254: RN1.8 37.17,35.78 37.59,36.21 37.59,37.26 LED5.A
N$31
  Top 0.254: RN1.7 37.78,34.91 LED6.A
N$32
  Top 0.254: RN1.6 38.13,34.11 LED7.A
N$33
  Top 0.254: IC7.2 29.17,38.78 33.85,34.11 RN1.3
N$34
  Top 0.254: IC7.3 29.44,39.28 33.81,34.91 RN1.2
N$35
  Top 0.254: IC7.4 29.7,39.78 33.7,35.78 RN1.1
N$42
  Bottom 0.305: 36.75,48.61 X2.1
  Bottom 0.813: U$3.ANT 33.53,43.57 36.07,46.11 36.58,47.05 X2.1
N$43
  cutout Bottom: 2.29,50.43 9.91,50.43 10.16,50.18 10.16,44.34 5.33,44.34 2.29,47.13
N$44  (via drill 0.38)
  Top 0.254: R16.2 37.85,31.64 v38.1,31.89
  Bottom 0.254: v38.1,31.89 38.96,31.03 X1.6 U$4.6
N$45
  Bottom 0.254: X1.2 U$4.2
N$46
  Bottom 0.254: X1.4 U$4.4
N$47
  Bottom 0.254: X1.3 U$4.3
NRST  (via drill 0.38)
  Top 0.254: J3.10 14.45,30.11 13.97,30.59 v13.97,30.87 | v34.04,38.49 33.27,38.49 30.48,41.29 IC7.7
  Bottom 0.254: v13.97,30.87 20.32,30.87 20.57,30.62 22.1,30.62 22.35,30.87 24.64,30.87 25.91,32.14 27.43,32.14 27.94,32.65 27.94,32.91 29.21,34.18 31.75,34.18 32.51,34.94 32.51,36.97 v34.04,38.49
NSS  (via drill 0.38)
  Top 0.254: IC7.46 24.8,35.54 26.67,33.67 28.96,33.67 v29.46,33.16
  Bottom 0.254: U$3.NSS 29.56,33.26 v29.46,33.16
RST  (via drill 0.38)
  Top 0.254: IC7.38 20.8,35.8 20.45,35.45 18.8,35.45 18.54,35.7 16.51,35.7 15.75,34.94 14.22,34.94 13.72,34.43 13.72,32.91 v12.95,32.14
  Bottom 0.254: v12.95,32.14 12.45,31.64 12.19,31.64 11.68,31.13 11.24,31.13 U$3.RESET
SCK  (via drill 0.38)
  Top 0.254: IC7.39 21.3,35.16 v20.95,34.81
  Bottom 0.254: U$3.SCK 30.51,39.54 29.21,38.24 29.21,37.22 28.7,36.72 28.7,35.95 27.43,34.68 21.08,34.68 v20.95,34.81
SCL  (via drill 0.38)
  Top 0.254: IC1.8 13.13,5.35 12.57,5.91 | 12.57,5.91 12.45,6.03 12.45,9.08 13.72,10.35 16,10.35 16.76,11.11 16.76,15.68 16.01,16.44 IC3.9 14.23,16.44 13.97,16.7 13.97,17.21 14.22,17.46 17.02,17.46 17.27,17.21 R5.1 | v12.19,5.78 12.57,5.91 | v17.27,5.78 18.03,6.54 19.05,6.54 19.81,7.3 19.81,8.57 20.6,9.36 IC2.6
  Bottom 0.254: v17.27,5.78 17.02,5.52 12.45,5.52 v12.19,5.78
SCL1  (via drill 0.38)
  Top 0.254: IC4.8 38.65,5.23 38.1,5.78 | 38.1,5.78 37.97,5.91 37.97,8.95 39.24,10.22 41.53,10.22 42.29,10.99 42.29,15.56 41.54,16.31 IC5.9 39.76,16.31 39.5,16.57 39.5,17.08 39.75,17.34 42.55,17.34 42.8,17.08 R10.1 | v37.72,5.65 38.1,5.78 | v42.8,5.65 43.56,6.41 44.58,6.41 45.34,7.18 45.34,8.45 46.13,9.24 IC6.6
  Bottom 0.254: v42.8,5.65 42.55,5.4 37.97,5.4 v37.72,5.65
SDA  (via drill 0.38)
  Top 0.254: IC2.1 19.64,6.36 18.8,5.52 v18.54,5.52 | IC1.9 13.75,6 v13.21,6.54 13.21,9.08 13.97,9.84 16.26,9.84 17.27,10.86 17.27,15.18 | IC3.10 16.27,16.94 17.27,15.94 17.27,15.18 | R4.1 17.27,15.18
  Bottom 0.254: v18.54,5.52 18.54,6.03 17.78,6.79 17.02,6.79 16.26,6.03 13.72,6.03 v13.21,6.54
SDA1  (via drill 0.38)
  Top 0.254: IC6.1 45.16,6.24 44.32,5.4 v44.07,5.4 | IC4.9 39.27,5.88 v38.73,6.41 38.73,8.95 39.5,9.72 41.78,9.72 42.8,10.73 42.8,15.05 | IC5.10 41.8,16.81 42.8,15.81 42.8,15.05 | R9.1 42.8,15.05
  Bottom 0.254: v44.07,5.4 44.07,5.91 43.31,6.67 42.55,6.67 41.78,5.91 39.24,5.91 v38.73,6.41
SWCLK  (via drill 0.38)
  Top 0.254: IC7.37 19.63,36.78 19.3,36.46 v19.3,36.21 | J3.4 18.8,29.64 18.8,30.62 19.18,31 20.45,31 20.57,31.13 20.57,32.91 20.95,33.29 v20.95,32.91
  Bottom 0.254: v19.3,36.21 18.8,35.7 18.8,33.41 19.3,32.91 v20.95,32.91
SWDAT  (via drill 0.38)
  Top 0.254: IC7.34 19.78,39.28 20.32,38.75 20.32,38.24 19.56,37.48 18.54,37.48 18.29,37.22 v18.29,36.72 | J3.2 20.83,29.1 21.34,29.6 v21.34,31.89
  Bottom 0.254: v18.29,36.72 18.29,32.65 19.05,31.89 v21.34,31.89
USART1_RX  (via drill 0.38)
  Top 0.254: IC7.43 23.3,34.75 25.65,32.4 25.65,30.87 27.69,28.84 42.42,28.84 42.93,29.35 42.93,31.38 44.2,32.65 44.2,37.99 43.69,38.49 42.67,38.49 41.66,39.51 40.39,39.51 v40.13,39.76
  Bottom 0.254: U$4.10 X1.10 40.89,41.23 40.89,40.27 40.39,39.76 v40.13,39.76
USART1_TX  (via drill 0.38)
  Top 0.254: IC7.42 22.8,34.49 25.15,32.14 25.15,30.62 27.43,28.33 42.67,28.33 43.43,29.1 43.43,31.13 44.7,32.4 44.7,38.24 43.69,39.26 v43.18,39.26
  Bottom 0.254: U$4.11 X1.11 42.67,41.26 v43.18,39.26
USART2_RX
  Top 0.254: JP4.TXO 22.02,47.72 23.11,46.62 25.4,46.62 25.8,46.22 IC7.13
USART2_TX  (via drill 0.38)
  Top 0.254: v26.67,45.86 26.67,44.41 IC7.12
  Bottom 0.254: JP4.RXI 19.43,48.02 20.83,46.62 25.91,46.62 v26.67,45.86
VBUS
  Top 0.61: C30.1 5.84,34.6 JP3.VBUS
  Top 1.016: JP3.VBUS 7.29,34.99 IC8.3
VCCS  (via drill 0.38)
  Top 0.254: IC1.6 8.35,6 7.87,5.52 7.87,5.02 9.4,3.49 v10.16,3.49 | LED2.C 21.18,1.82 v19.3,0.95
  Bottom 0.254: LED2.C 21.18,1.82 v19.3,0.95 SV2.1 SV2.2 SV2.3 SV2.4 10.41,3.24 v10.16,3.49
VCCS1  (via drill 0.38)
  Top 0.254: IC4.6 33.88,5.88 33.4,5.4 33.4,4.89 34.92,3.37 v35.69,3.37 | LED4.C 46.71,1.69 v44.83,0.83
  Bottom 0.254: LED4.C 46.71,1.69 v44.83,0.83 SV4.1 SV4.2 SV4.3 SV4.4 35.94,3.11 v35.69,3.37
W_RST  (via drill 0.38)
  Top 0.254: IC7.6 30.22,40.78 33.27,37.73 36.07,37.73 36.83,38.49 v37.59,38.49
  Bottom 0.254: v37.59,38.49 37.85,38.49 38.1,38.24 43.69,38.24 45.21,39.76 45.21,41.04 X1.12 U$4.12

## Text on the board
tPlace: C10 | R4 | R5 | C8 | IC3 | C7 | C9 | (C) | IC2 | R2 | R3 | C5 | C6 | WIFI | JP3 | RN1 | 868 | Matt Brejza | Jan 2015 | C3 | C4 | IC1 | R1 | R6 | C2 | C1 | S1 | BOOT | C12 | C12 | C11 | C11 | Q1 | Q1 | L4 | IC3 | R5 | L4 | IC3 | C10 | R5 | C10 | L3 | R4 | L3 | R4 | R3 | R3 | C6 | C6 | C4 | C4 | C5 | C5 | C3 | C7 | L1 | C8 | C3 | C7 | L1 | C8 | R1 | R2 | C2 | R1 | C2 | R2 | IC1 | C1 | C1 | IC1
bPlace: T | R | V | G | Add tape to / insulate vias | MB / Jan 2015 | MB / Jan 2015 | RST | RST | TST | TST | (C) | VCC | (C) | VCC | GND | GND | V | V | GND | IO1 | IO2 | GND | IO1 | IO2